# Altium PCB DAPLink.PcbDoc
Units mil, origin at the board's own origin, x right, y up, seen from the top; angles counter-clockwise.
Board outline 3937.01 x 3937.01 mil, 2 copper layers (Top Layer, Bottom Layer); 36 components, 32 nets, 140 pads, 29 vias.
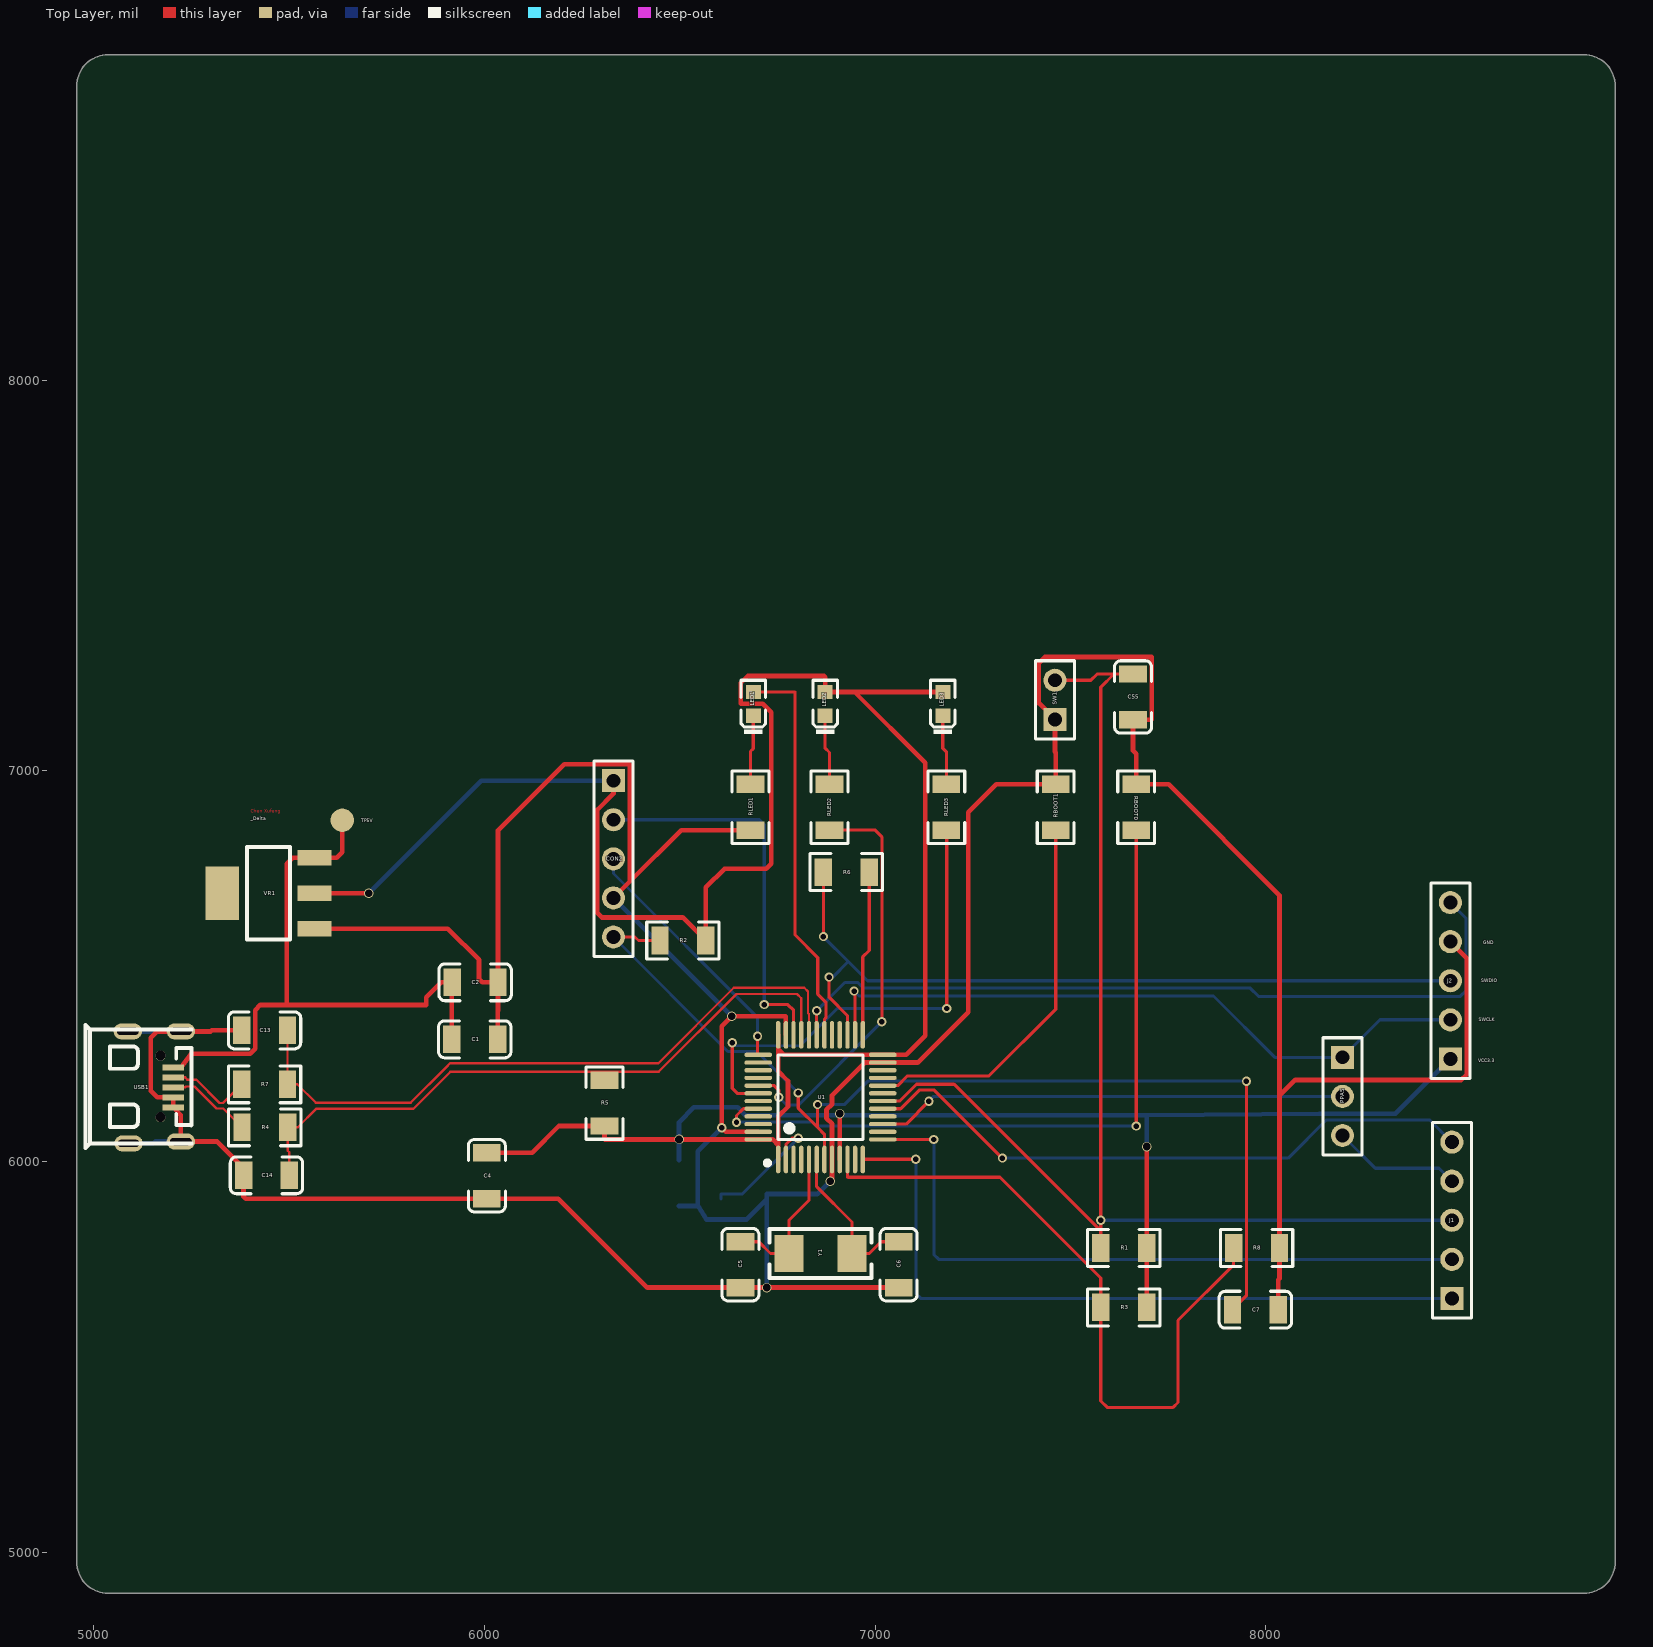
[diagram p0: Top Layer view]
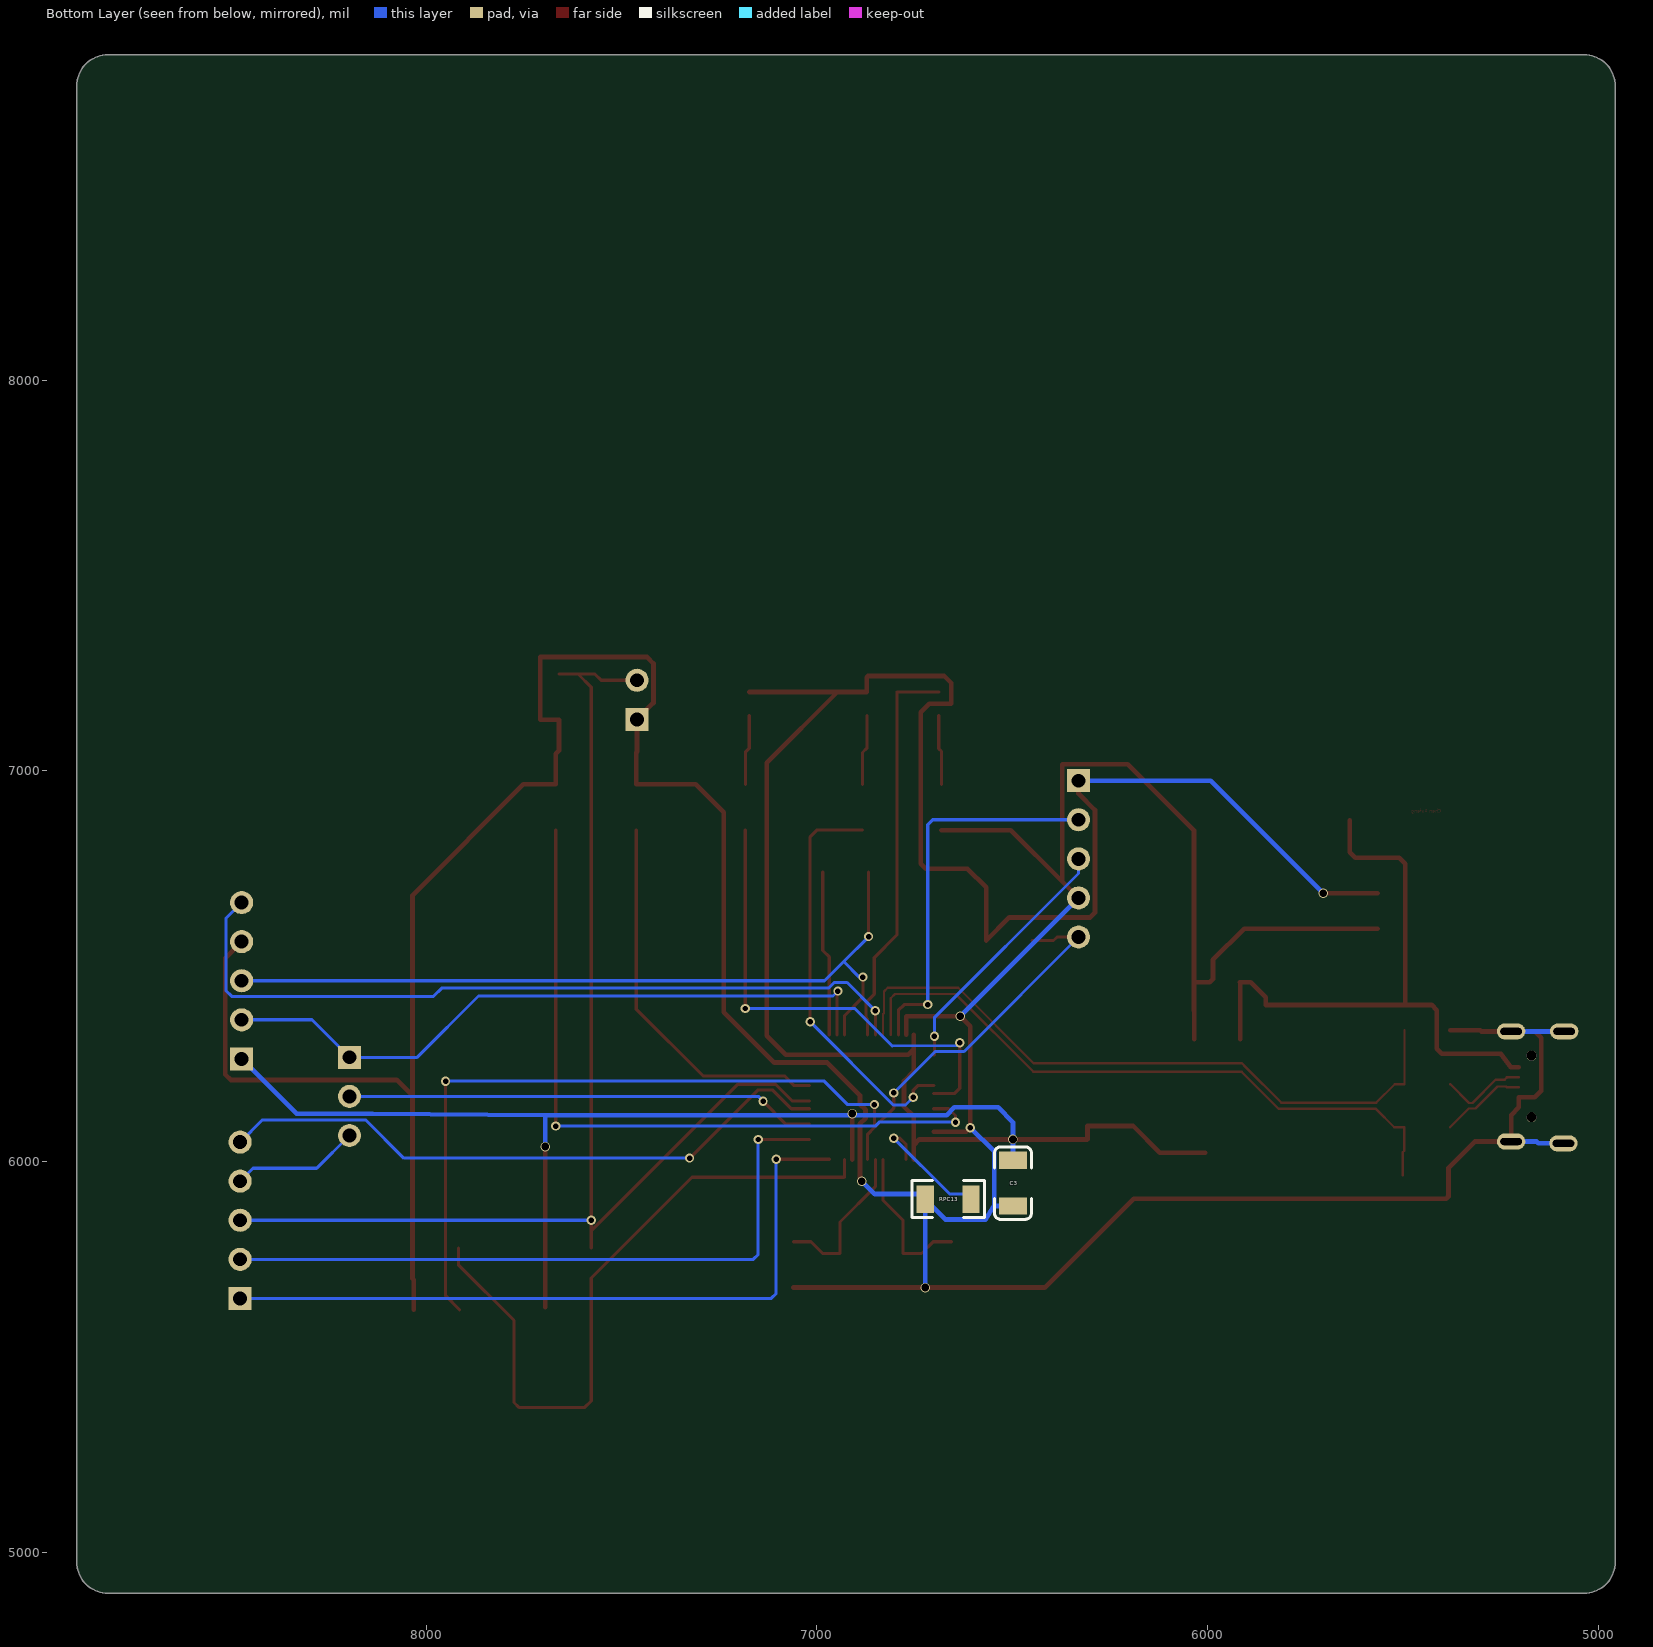
[diagram p1: Bottom Layer view, seen from below]
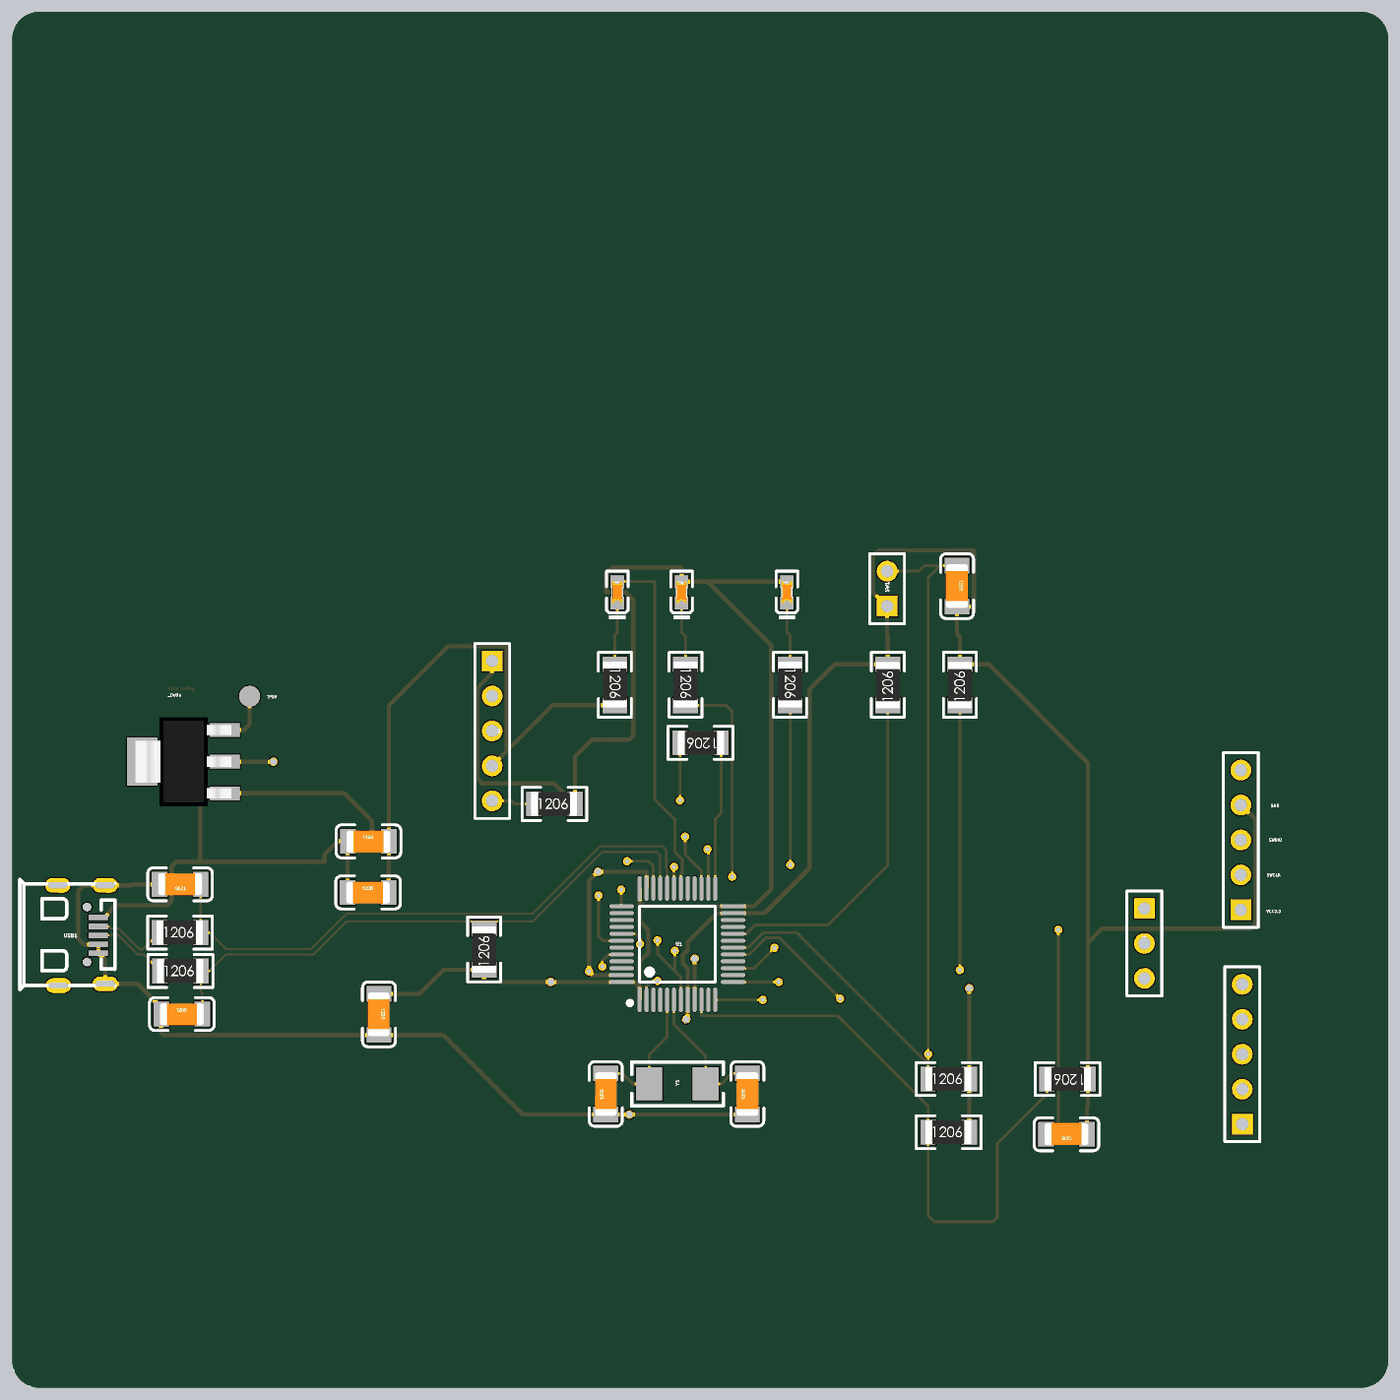
[diagram p2: 3D render of the assembled board from above, using the file's embedded part models]

## Layer stack, top to bottom
Top Solder: solder mask 0.4, Solder Resist, Dk 3.5
Top Layer: signal copper 1.4
Dielectric 1: dielectric 12.6, FR-4, Dk 4.8
Bottom Layer: signal copper 1.4
Bottom Solder: solder mask 0.4, Solder Resist, Dk 3.5

## Board outline
4956.74,4974.4 ccw(c5035.48,4974.4) 5035.48,4895.66 8815.01,4895.66 ccw(c8815.01,4974.4) 8893.75,4974.4 8893.75,8753.93 ccw(c8815.01,8753.93) 8815.01,8832.67 5035.48,8832.67 ccw(c5035.48,8753.93) 4956.74,8753.93

## Design rules (kind name [scope] priority, off if disabled: settings)
Clearance Polygon [InPolygon] p1: gap=8 ignorepadtopadclearanceinfootprint=FALSE
Clearance [All] p2: gap=6 ignorepadtopadclearanceinfootprint=FALSE
DiffPairsRouting DiffPair_USB1DiffPairsRouting [InDifferentialPair ('TGT_USB_D1')] p1: maxlimit=10 minlimit=10 mostfreqgap=10 toplayer_minwidth=6 toplayer_maxwidth=6 toplayer_prefwidth=6 bottomlayer_minwidth=6 bottomlayer_maxwidth=6 bottomlayer_prefwidth=6 maxuncoupledlength=500
DiffPairsRouting DiffPair_USB0DiffPairsRouting [InDifferentialPair ('TGT_USB_D')] p2: maxlimit=8 minlimit=8 mostfreqgap=8 toplayer_minwidth=6 toplayer_maxwidth=6 toplayer_prefwidth=6 bottomlayer_minwidth=6 bottomlayer_maxwidth=6 bottomlayer_prefwidth=6 maxuncoupledlength=500
DiffPairsRouting [All] p3: maxlimit=10 minlimit=10 mostfreqgap=16 toplayer_minwidth=15 toplayer_maxwidth=15 toplayer_prefwidth=8 bottomlayer_minwidth=15 bottomlayer_maxwidth=15 bottomlayer_prefwidth=8 maxuncoupledlength=500
MatchedLengths DiffPair_USB1MatchedLengths [InDifferentialPair ('TGT_USB_D1')] p1: tolerance=1000 checknetsindiffpair=TRUE checkdiffpairvsdiffpair=FALSE checkxsignals=FALSE checkothers=FALSE
MatchedLengths DiffPair_USB0MatchedLengths [InDifferentialPair ('TGT_USB_D')] p2: tolerance=1000 checknetsindiffpair=TRUE checkdiffpairvsdiffpair=FALSE checkxsignals=FALSE checkothers=FALSE
PolygonConnect Via [IsVia] p1: connectstyle=Direct reliefconductorwidth=10 reliefentries=4 polygonreliefangle="90 Angle" airgapwidth=10
PolygonConnect [All] p2: connectstyle=Relief reliefconductorwidth=10 reliefentries=4 polygonreliefangle="90 Angle" airgapwidth=10
RoutingVias PowerVia [InNetClass('Power')] p1: holewidth=19.68 width=24.41 viastyle="Through Hole" minholewidth=19.68 minwidth=24.41 maxholewidth=19.68 maxwidth=24.41
RoutingVias [All] p2: holewidth=13.78 width=23.62 viastyle="Through Hole" minholewidth=13.78 minwidth=23.62 maxholewidth=13.78 maxwidth=23.62
SolderMaskExpansion [All] p1: expansion=4
Width Power [InNetClass('Power')] p1: maxlimit=60 minlimit=12 preferedwidth=12
Width [All] p2: maxlimit=12 minlimit=6 preferedwidth=8
29 further rules are at their usual default settings.

## Classes and differential pairs
net class Power: GND NetC1_1 VCC33
differential pair TGT_USB_D1: +TGT_USB_D1_P -TGT_USB_D1_N
differential pair TGT_USB_D: +TGT_USB_D_P -TGT_USB_D_N

## Components (designator, comment, footprint, x,y, rotation, side; value= is the part's Value field where it differs from the comment)
C1 "10uF (475) 10% 50V" 1206_C 5975,6313 r0 top
C2 "100nF (475) 10% 50V" 1206_C 5976,6459 r0 top
C3 "10uF (475) 10% 50V" 1206_C 6498,5945 r270 bottom
C4 "100nF (475) 10% 50V" 1206_C 6006,5964 r270 top
C5 "20pF" 1206_C 6655,5736.34 r90 top
C6 "20pF" 1206_C 7060,5736.34 r90 top
C7 "100nF (475) 10% 50V" 1206_C 7973,5621 r180 top
C13 "18pF 10% 50V" 1206_C 5437,6336 r180 top
C14 "18pF 10% 50V" 1206_C 5442,5965 r0 top
C55 "100nF  10% 50V" 1206_C 7660,7189.28 r270 top
CON2 "Header 5" HDR1X5 6330,6975 r270 top
J1 "Header 5" HDR1X5 8476,5650 r90 top
J2 "Header 5" HDR1X5 8472,6263 r90 top
LED1 "红灯 0603" 0603_LED_S1 6688,7171.7 r90 top
LED2 "绿灯 0603" 0603_LED_S1 6871.89,7171.7 r90 top
LED3 "蓝灯 0603" 0603_LED_S1 7173,7171.7 r90 top
PPA5 "Header 3" HDR1X3 8196,6267 r270 top
R1 "100KΩ  ±1%" 1206_R 7636,5779 r0 top
R2 "100KΩ  ±1%" 1206_R 6508,6566 r0 top
R3 "4.7KΩ  ±1%" 1206_R 7636,5627 r0 top
R4 "22Ω  ±1%" 1206_R 5438,6088 r0 top
R5 "10KΩ  ±1%" 1206_R 6307,6150 r90 top
R6 "100Ω  ±1%" 1206_R 6926,6741 r180 top
R7 "22Ω  ±1%" 1206_R 5437,6198 r0 top
R8 "4.7KΩ  ±1%" 1206_R 7976,5779 r180 top
RBOOT0 "100KΩ  ±1%" 1206_R 7668,6907 r90 top
RBOOT1 "100KΩ  ±1%" 1206_R 7462,6907 r90 top
RLED1 "10KΩ  ±1%" 1206_R 6681,6907 r270 top
RLED2 "10KΩ  ±1%" 1206_R 6883,6907 r270 top
RLED3 "10KΩ  ±1%" 1206_R 7182,6907 r270 top
RPC13 "10KΩ  ±1%" 1206_R 6664,5904 r0 bottom
SW1 "Header 2" HDR1X2 7460,7132 r90 top
U1 "STM32F103CBT6" LQFP-48_7x7x05P 6860,6165 r0 top
USB1 "U254-051N-4BH806" MICRO-USB-SMD_U254-051N-4BH806 5155,6190 r270 top
VR1 "AMS1117-3.3" SOT-223 5447,6687 r0 top
Y1 "8MHz 20pF" SMD-5032_2P 6860,5765 r180 top

## Footprints (in the part's own frame and the unit in brackets; to place one, negate y for a bottom-side part, rotate by r counter-clockwise, add the part's x,y. Pads: shape width x height; smd on the part's side, far side on the other; paste and mask are expansions set on the pad)
0603_LED_S1 [mm]
  rect 0.93x0.98 smd: A(0.77,0) K(-0.77,0)
  silkscreen extent -1.97,-0.79 1.54,0.79, body extent -0.8,-0.4 0.8,0.4, height 0.6
1206_C [mm]
  rect 1.13x1.8 smd: 1(-1.49,0) 2(1.49,0)
  silkscreen extent -2.36,-1.2 2.35,1.2, body extent -1.6,-0.81 1.6,0.79, height 1
1206_R [mm]
  rect 1.13x1.8 smd: 1(-1.49,0) 2(1.49,0)
  silkscreen extent -2.35,-1.2 2.35,1.2, body extent -1.7,-0.86 1.65,0.87, height 0.85
HDR1X2 [mm] "Connector; Header; 2 Position"
  rect 1.5x1.5 hole 0.9: 1(0,0)
  round 1.5 hole 0.9: 2(2.54,0)
  silkscreen extent -1.27,-1.27 3.81,1.27
HDR1X3 [mm] "Connector; Header; 3 Position"
  rect 1.5x1.5 hole 0.9: 1(0,0)
  round 1.5 hole 0.9: 2(2.54,0) 3(5.08,0)
  silkscreen extent -1.27,-1.27 6.35,1.27
HDR1X5 [mm] "Connector; Header; 5 Position"
  rect 1.5x1.5 hole 0.9: 1(0,0)
  round 1.5 hole 0.9: 2(2.54,0) 3(5.08,0) 4(7.62,0) 5(10.16,0)
  silkscreen extent -1.27,-1.27 11.43,1.27
LQFP-48_7x7x05P [mm]
  oval 0.28x1.8 smd mask+0.051: 1(-2.75,-4.05) 2(-2.25,-4.05) 3(-1.75,-4.05) 4(-1.25,-4.05) 5(-0.75,-4.05) 6(-0.25,-4.05) 7(0.25,-4.05) 8(0.75,-4.05) 9(1.25,-4.05) 10(1.75,-4.05) 11(2.25,-4.05) 12(2.75,-4.05) 25(2.75,4.05) 26(2.25,4.05) 27(1.75,4.05) 28(1.25,4.05) 29(0.75,4.05) 30(0.25,4.05) 31(-0.25,4.05) 32(-0.75,4.05) 33(-1.25,4.05) 34(-1.75,4.05) 35(-2.25,4.05) 36(-2.75,4.05)
  oval 1.8x0.28 smd mask+0.051: 13(4.05,-2.75) 14(4.05,-2.25) 15(4.05,-1.75) 16(4.05,-1.25) 17(4.05,-0.75) 18(4.05,-0.25) 19(4.05,0.25) 20(4.05,0.75) 21(4.05,1.25) 22(4.05,1.75) 23(4.05,2.25) 24(4.05,2.75) 37(-4.05,2.75) 38(-4.05,2.25) 39(-4.05,1.75) 40(-4.05,1.25) 41(-4.05,0.75) 42(-4.05,0.25) 43(-4.05,-0.25) 44(-4.05,-0.75) 45(-4.05,-1.25) 46(-4.05,-1.75) 47(-4.05,-2.25) 48(-4.05,-2.75)
  silkscreen extent -3.6,-4.42 2.75,2.75
MICRO-USB-SMD_U254-051N-4BH806 [mm]
  rect 0.4x1.4 smd: 1(-1.3,1.225) 2(-0.65,1.225) 3(0,1.225) 4(0.65,1.225) 5(1.3,1.225)
  oval 1.05x1.849 hole 0.45 slot 1.4 at 90 deg: 6(-3.64,1.725) 7(-3.64,-1.725) 8(3.52,1.725) 9(3.64,-1.675)
  round 0.65 hole 0.65 unplated: ""(-2.06,0.405) ""(1.94,0.405)
  silkscreen extent -4.06,-4.48 3.94,2.42
SMD-5032_2P [mm]
  rect 1.9x2.4 smd: 1(-2.05,0) 2(2.05,0)
  silkscreen extent -3.33,-1.6 3.33,1.6
SOT-223 [mm]
  rect 2.2x1 smd: 1(3,-2.3) 2(3,0) 3(3,2.3)
  rect 2.2x3.5 smd: 2(-3,0)
  silkscreen extent -1.4,-3 1.4,3, body extent -3.49,-3.24 3.49,3.24, height 1.64

## Part data
C1 C2 C3 C4 C7 C13 C14 C55: library part "1206 4.7uF (475) 10% 50V", "贴片电容", Package=1206, SuppliersPartNumber=C29823, ComponentLink1Description=供应商链接, ComponentLink1URL=http://www.szlcsc.com/product/details_30577.html, Supplier=LC
C5 C6: library part "1206 2.2uF (225) 10% 50V", "贴片电容", Package=1206, SuppliersPartNumber=C12656, ComponentLink1Description=供应商链接, ComponentLink1URL=http://www.szlcsc.com/product/details_13292.html, Supplier=LC
CON2 J1 J2: "Header, 5-Pin", LatestRevisionDate=17-Jul-2002, LatestRevisionNote="Re-released for DXP Platform.", Publisher="Altium Limited"
LED1: library part "0603 红灯", "发光二极管", Package=0603, SuppliersPartNumber=C2286, ComponentLink1Description=供应商链接, ComponentLink1URL=http://www.szlcsc.com/product/details_2659.html, Supplier=LC
LED2: library part "0603 绿灯", "发光二极管", Package=0603, SuppliersPartNumber=C72043, ComponentLink1Description=供应商链接, ComponentLink1URL=http://www.szlcsc.com/product/details_73152.html, Supplier=LC
LED3: library part "0603 蓝灯", "发光二极管", Package=0603, SuppliersPartNumber=C72041, ComponentLink1Description=供应商链接, ComponentLink1URL=http://www.szlcsc.com/product/details_73150.html, Supplier=LC
PPA5: "Header, 3-Pin", LatestRevisionDate=17-Jul-2002, LatestRevisionNote="Re-released for DXP Platform.", Publisher="Altium Limited"
R1 R2 R3 R4 R5 R6 R7 R8 RBOOT0 RBOOT1 RLED1 RLED2 RLED3 RPC13: library part "1206 0Ω (0R0) 1%", "贴片电阻", Package=1206, SuppliersPartNumber=C17888, ComponentLink1Description=供应商链接, ComponentLink1URL=http://www.szlcsc.com/product/details_18576.html, Supplier=LC
SW1: "Header, 2-Pin", LatestRevisionDate=17-Jul-2002, LatestRevisionNote="Re-released for DXP Platform.", Publisher="Altium Limited"
U1: "ARM", Package=LQFP-48_7x7x05P, SuppliersPartNumber=C8304, ComponentLink1Description=供应商链接, ComponentLink1URL=http://www.szlcsc.com/product/details_8796.html, Supplier=LC
USB1: "microUSB", BOM_Manufacturer="XKB Enterprise", BOM_Manufacturer Part=U254-051N-4BH806, BOM_Supplier=LCSC, BOM_Supplier Part=C319170, Contributor=LCSC, spicePre=U, spiceSymbolName=U254-051N-4BH806
VR1: library part "SOT-223 AMS1117-3.3", "低压差线性稳压(LDO)", Package=SOT-223, SuppliersPartNumber=C6186, ComponentLink1Description=供应商链接, ComponentLink1URL=http://www.szlcsc.com/product/details_6652.html, Supplier=LC
Y1: library part "SMD-5032_2P 8MHz 20ppm 20pF", "贴片晶振", Package=SMD-5032_2P, SuppliersPartNumber=C115962, ComponentLink1Description=供应商链接, ComponentLink1URL=http://www.szlcsc.com/product/details_117214.html, Supplier=LC

## Free pads (board coordinates)
  round 60 smd: 2(5636,6874)

## Via types
v1: diameter 23.62, hole 13.78, Top Layer to Bottom Layer, 22 vias
v2: diameter 24.41, hole 19.68, Top Layer to Bottom Layer, 7 vias

## Nets (pads, with @x,y where several pads share a name; then routed paths per layer and width w, separated by ;. In a path a pad name is that pad's centre, name@x,y a point inside that pad or via, vN(x,y) a via of type N, cw(c..) or ccw(c..) an arc to the next point about the centre after c; other vN are vias at no path point)
BOOT1: RBOOT1.1 U1.20 | length 981.9
  Top Layer w8: U1.20 7057.93,6194.53 7082.81,6219.4 7291.4,6219.4 7462,6390 RBOOT1.1
GND: C1.2 C2.2 C3.2 C4.2 C5.1 C6.1 C7.1 C13.2 C14.1 C55.2 CON2.4 J2.4 R8.1 RBOOT0.2 RBOOT1.2 RLED1.2 RPC13.2 SW1.1 U1.8 U1.23 U1.35 U1.47 USB1.4 USB1.5 USB1.6 USB1.7 USB1.8 USB1.9 VR1.1 | length 11891.3
  Top Layer w12: C13.2 5301.69,6336 5299,6333.31 USB1.6 5162.5,6333.31 5146,6316.81 5146,6180.91 5162.5,6164.41 USB1.4 USB1.5 5222.91,6119.14 USB1.8 5315.58,6051.42 5383.34,5983.66 C14.1 5383.34,5911 5389,5905.34 C4.2 6188.66,5905.34 6416.32,5677.68 C5.1 v2(6722.66,5677.68) C6.1 ; VR1.1 5906,6596.45 5986,6516.45 5986,6467 5994,6459 C2.2 ; C1.2 6033.66,6385 6034.66,6386 C2.2 ; CON2.4 6372,6717 ; RLED1.2 6503.34,6848.34 6372,6717 ; U1.47 6617.58,6076.42 v1(6607,6087) 6607,6346 v2(6633,6372) 6770.42,6372 6771.42,6371 U1.35 ; v2(6885,5950) 6885,5951.47 6889.53,5956 U1.8 6889.53,6096.86 6875.19,6111.2 6875.19,6132.86 6889.53,6147.2 6889.53,6170.11 6973,6253.58 U1.23 7109,6253.58 7238,6382.58 7238,6894 7309.66,6965.66 RBOOT1.2 7462,7047 7460,7049 SW1.1 7418,7174 7418,7275 7434.5,7291.5 7707,7291.5 7708,7290.5 7708,7131.62 7707,7130.62 C55.2 7660,7052 7668,7044 RBOOT0.2 7751,6965.66 8034.66,6682 8034.66,6168.66 ; C7.1 8031.66,5698 8034.66,5701 R8.1 8034.66,6168.66 ; J2.4 8514,6521 8514,6223 8500,6209 8075,6209 8034.66,6168.66 ; C2.2 6034.66,6847.66 6204,7017 6371,7017 6372,7016 6372,6717
  Bottom Layer w12: USB1.7 USB1.6 ; USB1.9 5153,6046.7 5157.72,6051.42 USB1.8 ; CON2.4 v2(6633,6372) ; v1(6607,6087) 6546,6026 6546,5887.34 ; v2(6722.66,5677.68) RPC13.2 ; v2(6885,5950) 6852,5917 6722.66,5917 RPC13.2 ; 6546,5887.34 6545,5886.34 C3.2 6546,5887.34 ; 6546,5887.34 6568,5852 6670.66,5852 RPC13.2
IF_NRESET: C7.2 CON2.5 R2.1 U1.7 | length 2740
  Top Layer w8: CON2.5 6385,6575 6394,6566 R2.1 ; v1(6803,6175.84) 6803,6137.04 6852.5,6087.54 ; v1(6852.5,6146) 6852.5,6087.54 ; U1.7 6869.84,6070.2 6852.5,6087.54 ; C7.2 7950,5656.66 v1(7950,6206)
  Bottom Layer w8: CON2.5 6623,6282 6696.84,6282 v1(6803,6175.84) ; v1(6852.5,6146) 6921,6146 6981,6206 v1(7950,6206)
IF_SWCLK: CON2.3 U1.37 | length 656.1
  Top Layer w8: v1(6699,6321) 6699,6273.27 U1.37
  Bottom Layer w8: CON2.3 6330,6737.5 6699,6368.5 v1(6699,6321)
IF_SWDIO: CON2.2 U1.34 | length 995.8
  Top Layer w8: v1(6716,6402) 6776.6,6402 6791.1,6387.5 U1.34
  Bottom Layer w8: CON2.2 6703.5,6875 6716,6862.5 v1(6716,6402)
LED_COM_GRN: RLED2.2 U1.41 | length 1050.2
  Top Layer w8: U1.41 6741.46,6194.53 6753,6182.99 v1(6753,6165) ; RLED2.2 7000,6848.34 7017,6831.34 v1(7017,6357.91)
  Bottom Layer w8: v1(6753,6165) 6773,6145 6804.09,6145 v1(7017,6357.91)
LED_DAP_BULE: RLED3.2 U1.42 | length 1241.4
  Top Layer w8: v1(6634,6304) 6634,6187.5 6646.66,6174.84 U1.42 ; RLED3.2 7183,6848.34 v1(7183,6392)
  Bottom Layer w8: v1(6634,6304) 6634,6297 6806.81,6296 6902.81,6392 v1(7183,6392)
LED_PWR_RED: LED1.A U1.30 | length 1018.8
  Top Layer w8: LED1.A 6794.98,7202.02 6795,6580 6853,6522 6853,6428.62 6873.81,6407.81 6873.81,6367.87 6869.84,6363.9 U1.30
NetC1_1: C1.1 C2.1 pad.2 USB1.1 VR1.3 | length 1616.9
  Top Layer w12: USB1.1 5223,6241.18 5249,6276 5400,6276 5413,6289 5413,6387.5 5426.5,6401 5851,6401 5851,6421 5889,6459 C2.1 5916.34,6458 C1.1 ; 5494,6405 5494,6762.5 5509.05,6777.55 VR1.3 5621.55,6777.55 5636,6792 pad.2
NetLED1_K: LED1.K RLED1.1 | length 178.6
  Top Layer w8: RLED1.1 6681,7050 6688,7057 LED1.K
NetLED2_K: LED2.K RLED2.1 | length 180.3
  Top Layer w8: LED2.K 6871.89,7058.11 6883,7047 RLED2.1
NetLED3_K: LED3.K RLED3.1 | length 179.5
  Top Layer w8: LED3.K 7173,7058 7182,7049 RLED3.1
NetR6_1: R6.1 U1.25 | length 423.3
  Top Layer w8: U1.25 6968.27,6524 6984.66,6540.39 R6.1
NetRBOOT0_1: RBOOT0.1 U1.44 | length 1864.3
  Top Layer w8: v1(6645,6101) 6645,6117.97 6662.5,6135.47 U1.44 ; v1(7668,6091) RBOOT0.1
  Bottom Layer w8: v1(6645,6101) 6840,6101 6850,6091 v1(7668,6091)
PA0: R3.1 R8.2 U1.10 | length 1778.9
  Top Layer w8: U1.10 6928.9,5961 6929.9,5960 7319.34,5960 7577.34,5702 R3.1 7577.34,5387.5 7593.84,5371 7762.5,5371 7775,5383.5 7775,5593.66 7917.34,5736 R8.2
PA5: PPA5.2 U1.15 | length 1205.9
  Top Layer w8: U1.15 7079,6096.1 v1(7137.4,6154.5)
  Bottom Layer w8: v1(7137.4,6154.5) 7149.9,6167 PPA5.2
PC13: RPC13.1 U1.2 | length 346.5
  Top Layer w8: U1.2 6771.42,6043.92 6787.5,6060 v1(6803,6060)
  Bottom Layer w8: RPC13.1 6605.34,5917 6660,5917 v1(6803,6060)
PIN_5: C5.2 U1.5 Y1.2 | length 398.5
  Top Layer w8: C5.2 6702,5795 6732,5765 Y1.2 6779.29,5850 6830.47,5901.18 U1.5
PIN_6: C6.2 U1.6 Y1.1 | length 409.8
  Top Layer w8: U1.6 6850.16,5936 6940.71,5845.45 Y1.1 6985,5765 7015,5795 C6.2
TDI: J1.5 U1.17 | length 1612.2
  Top Layer w8: U1.17 7065,6135.47 7112.6,6183.07 7151.43,6183.07 v1(7325.5,6009)
  Bottom Layer w8: v1(7325.5,6009) 8057,6009 8154.53,6106.53 8419.47,6106.53 J1.5
TDO: J1.4 PPA5.3 | length 328.5
  Bottom Layer w8: PPA5.3 8280,5983 8443,5983 J1.4
TGT_NRESET: C55.1 J1.3 R1.1 SW1.2 U1.18 | length 3319.3
  Top Layer w8: U1.18 7062.66,6155.16 7105.57,6198.07 7201.93,6198.07 7577.34,5822.66 ; SW1.2 7552,7232 7567.95,7247.95 7611,7247.95 ; R1.1 7577.34,5822.66 ; C55.1 7611,7247.95 ; 7577.34,5822.66 v1(7577.34,5850) 7577.34,7214.28 7611,7247.95
  Bottom Layer w8: v1(7577.34,5850) J1.3
TGT_RX: J1.1 U1.12 | length 1856.9
  Top Layer w8: U1.12 6968.27,6006 v1(7104,6006)
  Bottom Layer w8: v1(7104,6006) 7104,5662.5 7116.5,5650 J1.1
TGT_SWCLK: J2.2 PPA5.1 U1.26 | length 1749.1
  Top Layer w8: v1(6946,6436.5) 6948.58,6433.92 U1.26
  Bottom Layer w8: v1(6946,6436.5) 6958.5,6424 7866,6424 8023,6267 PPA5.1 8292,6363 J2.2
TGT_SWDIO: J2.3 R6.2 U1.27 | length 2049.4
  Top Layer w8: v1(6867.34,6575.97) R6.2 ; v1(6882,6472.31) 6882,6420.9 6928.9,6374 U1.27
  Bottom Layer w8: v1(6867.34,6575.97) 6931.16,6512.16 ; v1(6882,6472.31) 6891.31,6472.31 6931.16,6512.16 ; J2.3 6980.31,6463 6931.16,6512.16
TGT_SWO: J2.5 U1.31 | length 2016
  Top Layer w8: U1.31 v1(6850.16,6386)
  Bottom Layer w8: v1(6850.16,6386) 6922.47,6458.31 6955.69,6458.31 6970,6444 7960,6444 7981,6423 8497.5,6423 8512,6437.5 8512,6623 J2.5
TGT_TX: J1.2 U1.13 | length 1756
  Top Layer w8: U1.13 v1(7150,6056.73)
  Bottom Layer w8: v1(7150,6056.73) 7150,5762.5 7162.5,5750 J1.2
TGT_USB_D1_N: C13.1 R7.2 U1.32 | length 1727.7
  Top Layer w6: C13.1 R7.2 5520.91,6198 5567.91,6151 5811,6151 5901.31,6241.31 5912,6252 6445,6252 6638,6445 6800,6445 6818.63,6445 6828,6435.63 6828,6380 6830.47,6377.53 U1.32
TGT_USB_D1_P: C14.2 R4.2 R5.2 U1.33 | length 1766.3
  Top Layer w6: C14.2 5500.66,6024 5496.66,6028 R4.2 5521.91,6088 5568.91,6135 5817.63,6135 5912.63,6230 6445.63,6230 6644.63,6429 6800,6429 6810.79,6418.21 U1.33 6810.79,6412.5
TGT_USB_D_N: R7.1 USB1.2 | length 222.2
  Top Layer w6: USB1.2 5233.79,6215.59 5239.38,6210 5262,6210 5322,6150 5330.34,6150 R7.1
TGT_USB_D_P: R4.1 USB1.3 | length 220.2
  Top Layer w6: USB1.3 5233.79,6190 5236,6192.2 5258,6192.2 5314.2,6136 5331.34,6136 R4.1
VCC33: C3.1 C4.1 CON2.1 J2.1 LED2.A LED3.A R1.2 R2.2 R3.2 R5.1 U1.1 U1.9 U1.24 U1.36 U1.48 VR1.2@5565.11,6687 | length 9030.4
  Top Layer w12: VR1.2@5565.11,6687 v2(5704,6687) ; C4.1 6122,6022.66 6190.68,6091.34 R5.1 6307,6057.73 6308,6056.73 v2(6498,6056.73) U1.48 6737.5,6056.73 6751.73,6042.5 ; CON2.1 6330,6942 6288,6900 6288,6637.5 6300.5,6625 6507.66,6625 R2.2 6566.66,6702.16 6614.5,6750 6721.5,6750 6734,6762.5 6734,7150.21 6712.5,7171.71 6657,7171.71 6656,7172.71 6656,7225 6674,7243 6869,7243 6871.89,7240.11 LED2.A 6947,7202.02 ; U1.1 6751.73,6042.5 ; U1.36 6751.73,6287.5 ; U1.9 v2(6909.21,6123) ; LED3.A 6947,7202.02 ; R3.2 R1.2 v2(7694.66,6038.66) ; 6751.73,6042.5 6751.73,6115.75 6776.81,6140.83 6776.81,6206.36 6751.73,6231.44 6751.73,6287.5 ; 6751.73,6287.5 6765.96,6273.27 U1.24 7079,6273.27 7128,6322.27 7128,7021.02 6947,7202.02
  Bottom Layer w12: v2(5704,6687) 5992,6975 CON2.1 ; C3.1 v2(6498,6056.73) 6498,6101 6536.04,6139.04 6647.83,6139.04 6667.86,6119 v2@6909.21,6119 ; v2(6909.21,6123) v2@6909.21,6119 ; v2(7694.66,6038.66) 7694.66,6119 ; J2.1 8331.53,6122.53 8136.94,6122.53 7694.66,6119 ; v2@6909.21,6119 7694.66,6119 ; v2@6909.21,6119 7694.66,6119
pads on no net: U1.3 U1.4 U1.11 U1.14 U1.16 U1.19 U1.21 U1.22 U1.28 U1.29 U1.38 U1.39 U1.40 U1.43 U1.45 U1.46 USB1. VR1.2@5328.89,6687

## Other copper
Top Layer:
  text "Chen Xufeng" at 5402,6893 h8

## Silkscreen, mask and mechanical layers (free items; w line width, h text height)
Top Overlay:
  text "_Delta" at 5402,6874 h8
  text "TP5V" at 5684,6869 h8
  text "GND" at 8556,6557 h8
  text "SWDIO" at 8551,6459 h8
  text "SWCLK" at 8545,6359 h8
  text "VCC3.3" at 8544,6255 h8
Mechanical 12:
  circle w0.5: c5153.59,8635.82 r59.06
  circle w0.5: c8696.9,8635.82 r59.06
  circle w0.5: c5153.59,5092.51 r59.06
  circle w0.5: c8696.9,5092.51 r59.06
  lines w0.5: 4956.74,4974.4 ccw(c5035.48,4974.4) 5035.48,4895.66 8815.01,4895.66 ccw(c8815.01,4974.4) 8893.75,4974.4 8893.75,8753.93 ccw(c8815.01,8753.93) 8815.01,8832.67 5035.48,8832.67 ccw(c5035.48,8753.93) 4956.74,8753.93 4956.74,4974.4